# EAGLE board VCF-LM358-Stereo-alt (EAGLE 7.2.0)
Voltage-Controlled Low-Pass Filter using LM358 Dual-Opamp (Stereo) http://electro-music.com/forum/topic-45231-0.html&postdays=0&postorder=asc&highlight=
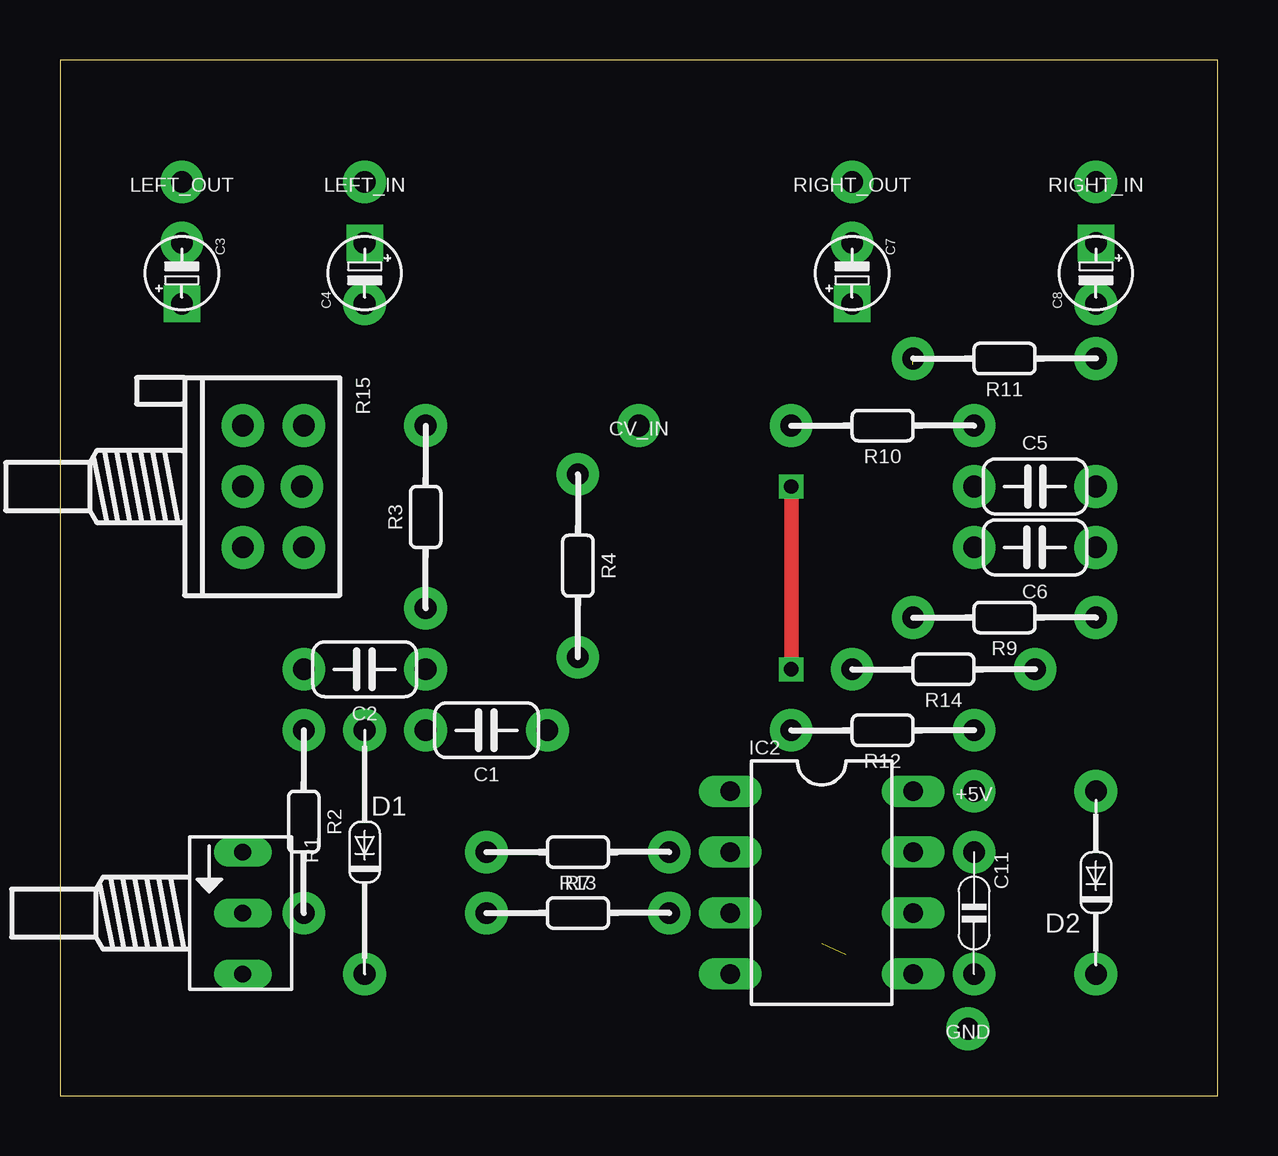
[diagram p0: board, top side]
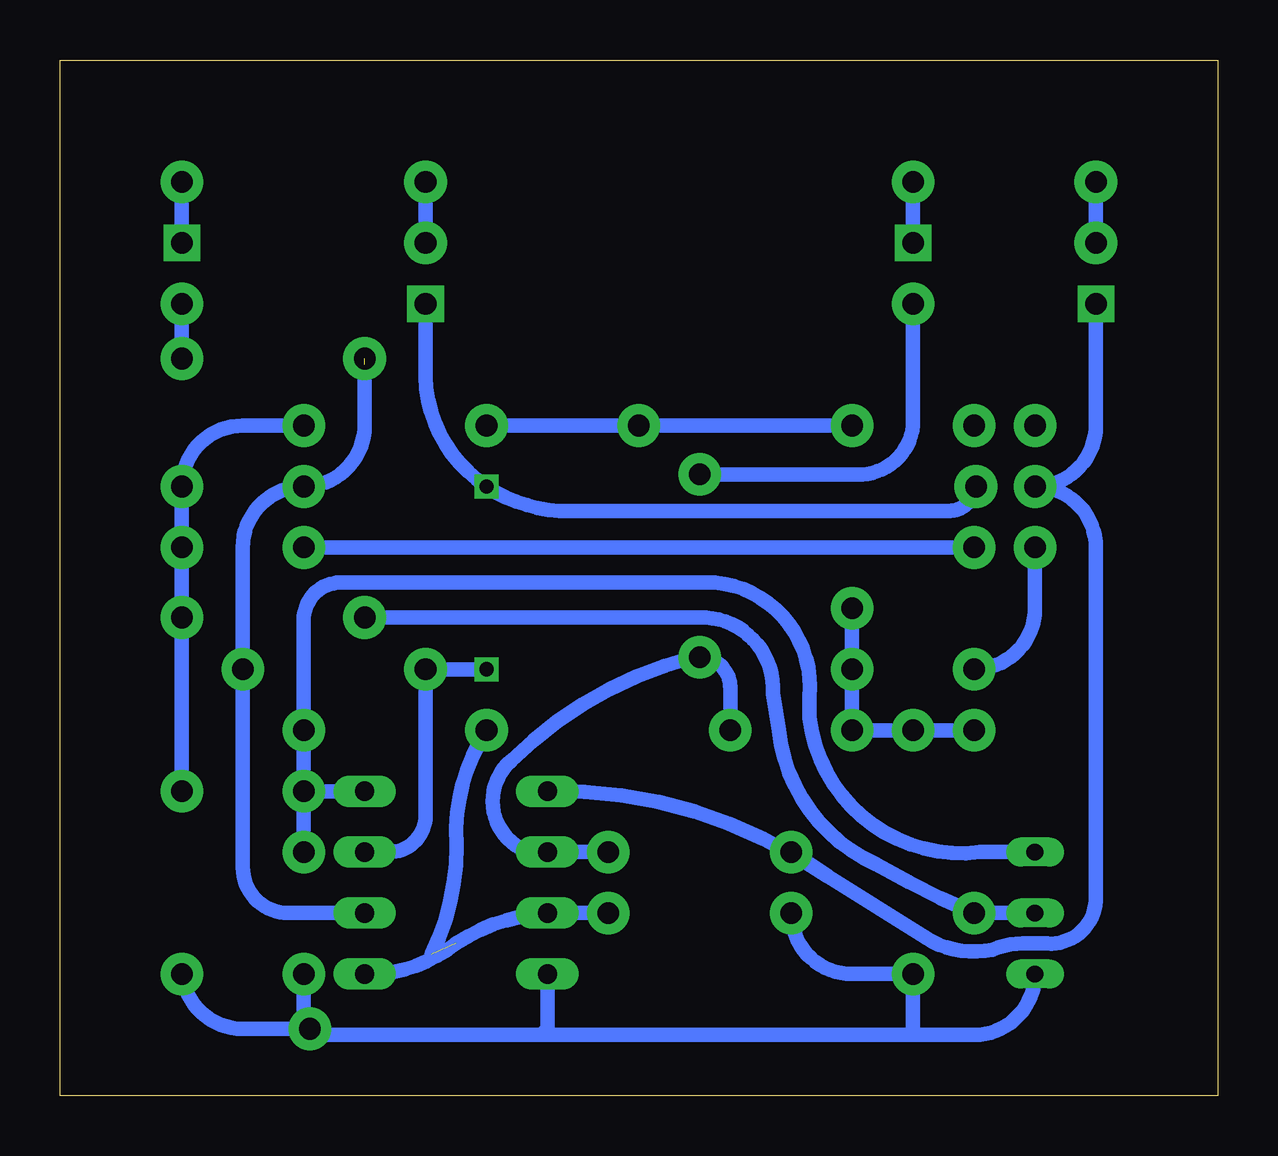
[diagram p1: board, bottom side, seen from below]

Size 48.26 x 43.18 mm. Coordinates in mm from the lower left corner, seen from the top.
Outline: 0,0 48.26,0 48.26,43.18 0,43.18 0,0
Copper layers (1*16): Top 0.035mm / dielectric 1.5mm / Bottom 0.035mm
Design rules "default": minimum track width 10mil, minimum drill 24mil, track to track 8mil, track to pad 8mil, pad to pad 8mil, via to via 8mil, smd to smd 8mil, copper to edge 40mil, drill to drill 8mil, minimum pad ring 10mil, minimum via ring 8mil, stop-mask expansion 4mil, vias tented up to drill 0mil, thermal gap 10mil

## Footprints (pad centres in the part's own frame; a part is rotated, then mirrored left to right if it is on the bottom)
SPAD = drill 0.9 pad 1.778: 1 0,0
C050-024X044 = drill 0.9 pad 1.778: 1 -2.54,0; 2 2.54,0
E2,5-3 = drill 0.9 pad 1.524 square: + -1.27,0 | drill 0.9 pad 1.778: - 1.27,0
C050-020X036 = drill 0.9 pad 1.778: 1 -2.54,0; 2 2.54,0
DO34-10V = drill 0.9 pad 1.778: A 0,5.08; C 0,-5.08
DO34-7V = drill 0.9 pad 1.778: A 0,-3.81; C 0,3.81
DIL08 = drill 0.8 pad 1.27 long: 1 -3.81,3.81; 2 -3.81,1.27; 3 -3.81,-1.27; 4 -3.81,-3.81; 5 3.81,-3.81; 6 3.81,-1.27; 7 3.81,1.27; 8 3.81,3.81
B64Y = drill 0.7 long: A 2.54,0; E -2.54,0; S 0,0
0202/7 = drill 0.9 pad 1.778: 1 -3.81,0; 2 3.81,0
POT-STEREO-2X3 = drill 0.9 pad 1.778: 1-A -2.54,-2.54; 1-E 2.54,-2.54; 1-S 0,-2.54; 2-A -2.54,0; 2-E 2.54,0; 2-S 0,-0.08

## Placement (x,y rotation side)
+5V  VCC  [SPAD]  38.1,12.7 90 top
C1  100nF  [C050-024X044]  17.78,15.24 180 top
C2  100nF  [C050-024X044]  12.7,17.78 180 top
C3  1μF  [E2,5-3]  5.08,34.29 90 top
C4  1μF  [E2,5-3]  12.7,34.29 270 top
C5  100nF  [C050-024X044]  40.64,25.4 0 top
C6  100nF  [C050-024X044]  40.64,22.86 180 top
C7  1μF  [E2,5-3]  33.02,34.29 90 top
C8  1μF  [E2,5-3]  43.18,34.29 270 top
C11  100nF  [C050-020X036]  38.1,7.62 270 top
CV_IN  CV_IN  [SPAD]  24.13,27.94 90 top
D1  1N4148  [DO34-10V]  12.7,10.16 0 top
D2  1N4148  [DO34-7V]  43.18,8.89 180 top
GND  GND  [SPAD]  37.85,2.79 90 top
IC2  LM358N  [DIL08]  31.75,8.89 0 top
LEFT_IN  AUDIO_IN  [SPAD]  12.7,38.1 90 top
LEFT_OUT  AUDIO_OUT  [SPAD]  5.08,38.1 90 top
R1  100kΩ  [B64Y]  7.62,7.62 270 top
R2  1kΩ  [0202/7]  10.16,11.43 270 top
R3  1kΩ  [0202/7]  15.24,24.13 90 top
R4  470kΩ  [0202/7]  21.59,22.1 270 top
R7  100kΩ  [0202/7]  21.59,10.16 180 top
R9  1kΩ  [0202/7]  39.37,19.94 180 top
R10  1kΩ  [0202/7]  34.29,27.94 180 top
R11  470kΩ  [0202/7]  39.37,30.73 180 top
R12  100kΩ  [0202/7]  34.29,15.24 180 top
R13  100kΩ  [0202/7]  21.59,7.62 0 top
R14  100kΩ  [0202/7]  36.83,17.78 180 top
R15  [POT-STEREO-2X3]  10.16,25.4 270 top
RIGHT_IN  AUDIO_IN  [SPAD]  43.18,38.1 90 top
RIGHT_OUT  AUDIO_OUT  [SPAD]  33.02,38.1 90 top

## Library data of the parts
+5V CV_IN GND LEFT_IN LEFT_OUT RIGHT_IN RIGHT_OUT = pad
C1-C8 C11 = c
D1 D2 = d
IC2 = ic
R1-R4 R7 R9-R15 = r

## Nets
2OUT: C7.+ IC2.7 R14.2
CUTOFF: R1.S R2.2 R9.2
CV_IN: CV_IN.1 R3.2 R10.2
GND: C11.2 D1.C D2.C GND.1 IC2.4 R1.A R13.1
IN-1: C1.1 IC2.2 R4.2 R7.1
IN-2: C5.1 IC2.6 R11.2 R14.1
N$1: C4.+ LEFT_IN.1
N$3: C2.2
N$6: C3.- LEFT_OUT.1
N$10: C4.- R4.1
N$11: C6.2
N$18: C7.- RIGHT_OUT.1
N$19: C8.+ RIGHT_IN.1
N$20: C8.- R11.1
OUT1: C3.+ IC2.1 R7.2
VC1: C1.2 C2.1 D1.A R2.1 R3.1
VC2: C5.2 C6.1 D2.A R9.1 R10.1
VCC: +5V.1 C11.1 IC2.8 R1.E R12.1
VGND: IC2.5 R12.2 R13.2

## Tracks (layer width: path | path; a pad name or v marks a point on that pad's centre or on a via)
2OUT  (via drill 0.6)
  Top 0.61: v30.48,17.78 v30.48,25.4
  Bottom 0.61: IC2.7 34.54,10.16 arc-90 33.02,11.68 R14.2 v30.48,17.78 | 10.16,25.4 arc90 11.18,24.38 27.43,24.38 arc30 v30.48,25.4 arc60 33.02,30.48 C7.+
CUTOFF
  Bottom 0.61: R9.2 21.34,19.94 arc90 18.54,16.76 18.29,15.24 arc-60 14.22,9.65 arc-8 R2.2 R1.S
CV_IN
  Bottom 0.61: R10.2 CV_IN.1 R3.2
GND
  Bottom 0.61: R1.A arc90 10.16,2.54 12.7,2.54 | 12.7,2.54 28.19,2.54 | 28.19,2.54 38.35,2.54 | 38.35,2.54 GND.1 40.64,2.79 arc90 43.18,5.33 D2.C | IC2.4 27.69,5.08 27.94,4.83 27.94,2.79 28.19,2.54 | C11.2 38.1,2.79 38.35,2.54 | 12.7,2.54 D1.C 15.24,5.08 arc90 R13.1
IN-1
  Bottom 0.61: C1.1 20.32,17.02 arc-90 R4.2 21.84,18.29 arc-30 29.46,13.97 arc-120 28.7,10.16 IC2.2 R7.1
IN-2  (1 unrouted)
  Bottom 0.61: IC2.6 38.73,7.62 arc90 40.64,9.52 R14.1 40.64,22.86 arc90 C5.1 arc-90 35.56,27.94 35.56,30.48
N$1
  Bottom 0.61: C4.+ LEFT_IN.1
N$3
  Bottom 0.61: C2.2 arc-90 7.62,20.32 7.62,22.86
N$6
  Bottom 0.61: C3.- LEFT_OUT.1
N$10
  Bottom 0.61: R4.1 15.24,25.91 arc-90 12.7,27.94 C4.-
N$11
  Bottom 0.61: C6.2 10.16,22.86
N$18
  Bottom 0.61: C7.- RIGHT_OUT.1
N$19
  Bottom 0.61: RIGHT_IN.1 C8.+
N$20
  Bottom 0.61: C8.- R11.1
OUT1
  Bottom 0.61: 28.45,12.7 IC2.1 arc36 16.26,9.14 | 16.26,9.14 12.19,6.6 arc-45 9.4,6.1 arc23 8.13,6.35 7.11,6.35 arc-90 5.08,8.13 5.08,22.86 arc-90 7.62,25.4 arc-90 5.08,27.94 C3.+ | 17.78,9.91 R7.2 16.26,9.14
VC1
  Bottom 0.61: R2.1 D1.A C1.2 C2.1 R3.1
VC2
  Bottom 0.61: D2.A R9.1 C5.2 | C5.2 arc90 40.64,27.94 R10.1 | C5.2 C6.1
VCC
  Bottom 0.61: +5V.1 R12.1 38.1,19.81 arc90 36.58,21.4 20.95,21.4 arc90 17.02,16.64 17.02,15.75 arc-90 9.91,10.16 R1.E | +5V.1 IC2.8 | +5V.1 C11.1
VGND  (1 unrouted)
  Bottom 0.61: IC2.5 34.8,5.08 arc-30 31.75,6.35 arc30 27.94,7.62 R13.2 | R12.2 arc-30 31.75,11.18 arc30 32.77,5.89